# Altium PCB 电子脚铐便携式主控板V3.PcbDoc
Units mm, origin at the board's own origin, x right, y up, seen from the top; angles counter-clockwise.
Board outline 48 x 72 mm, 2 copper layers (Top Layer, Bottom Layer), stack 1.071 mm thick; 65 components, 44 nets, 224 pads, 41 vias.
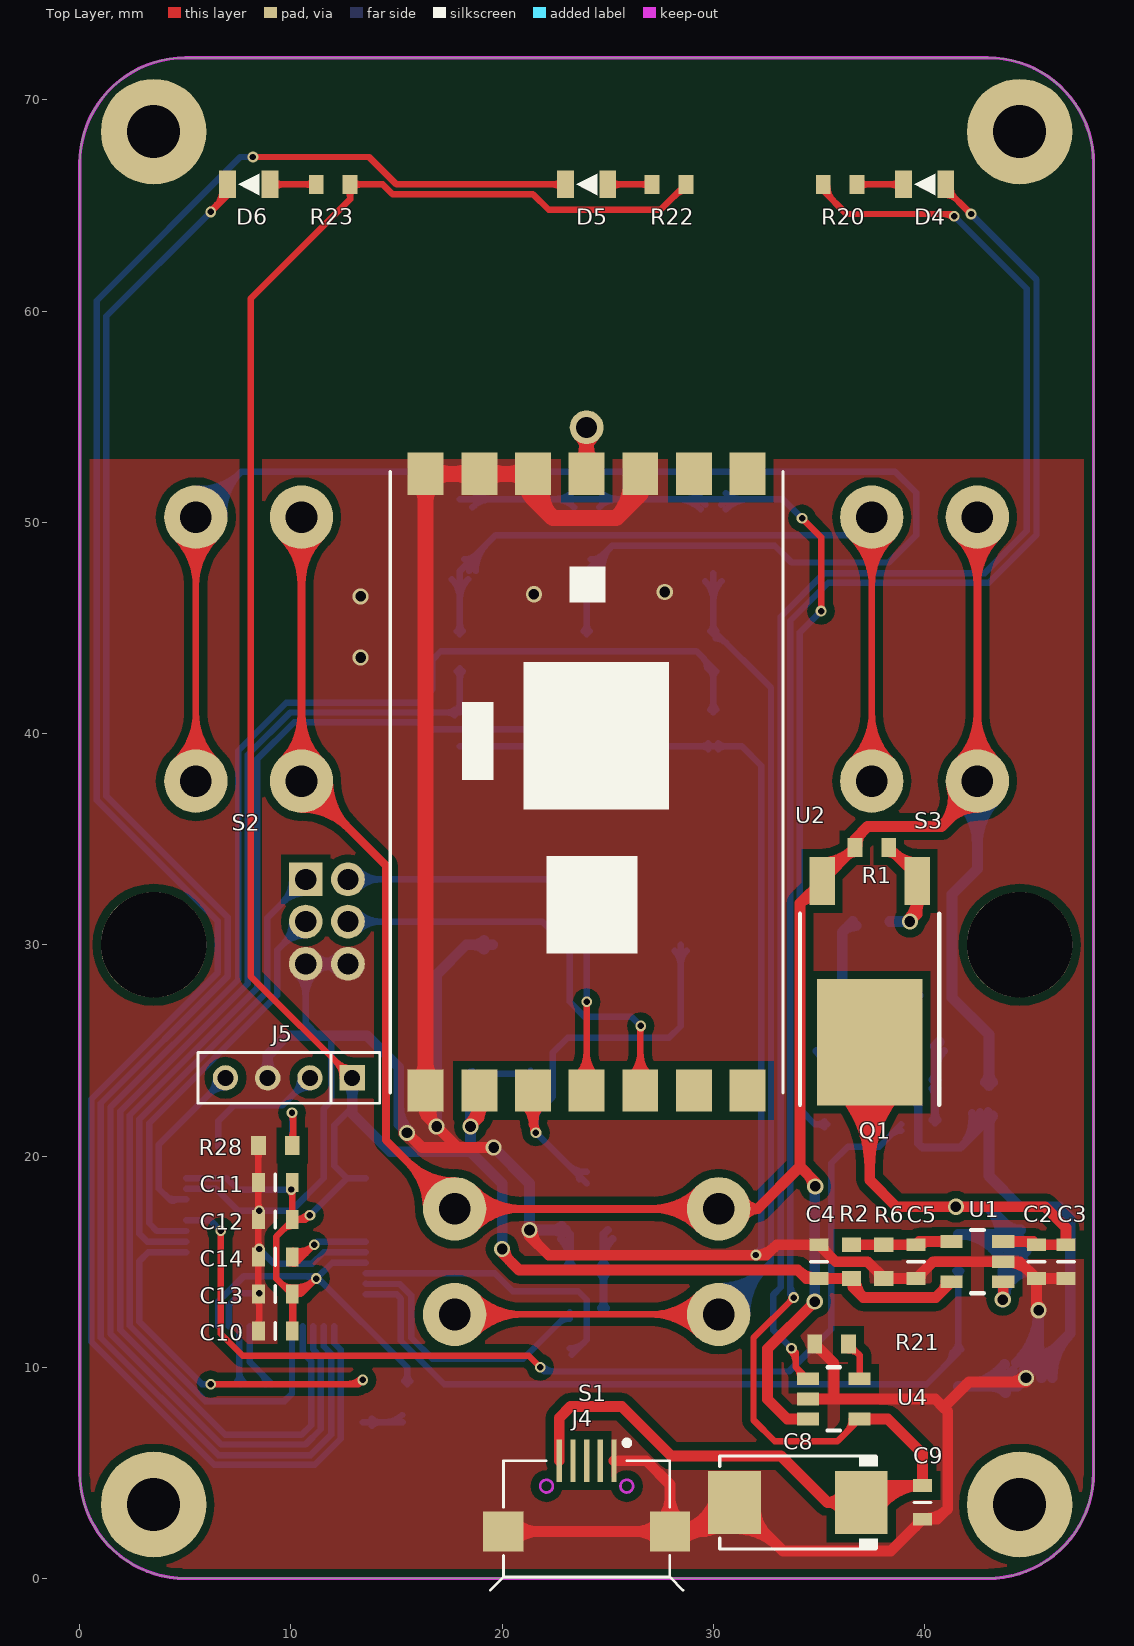
[diagram p0: Top Layer view]
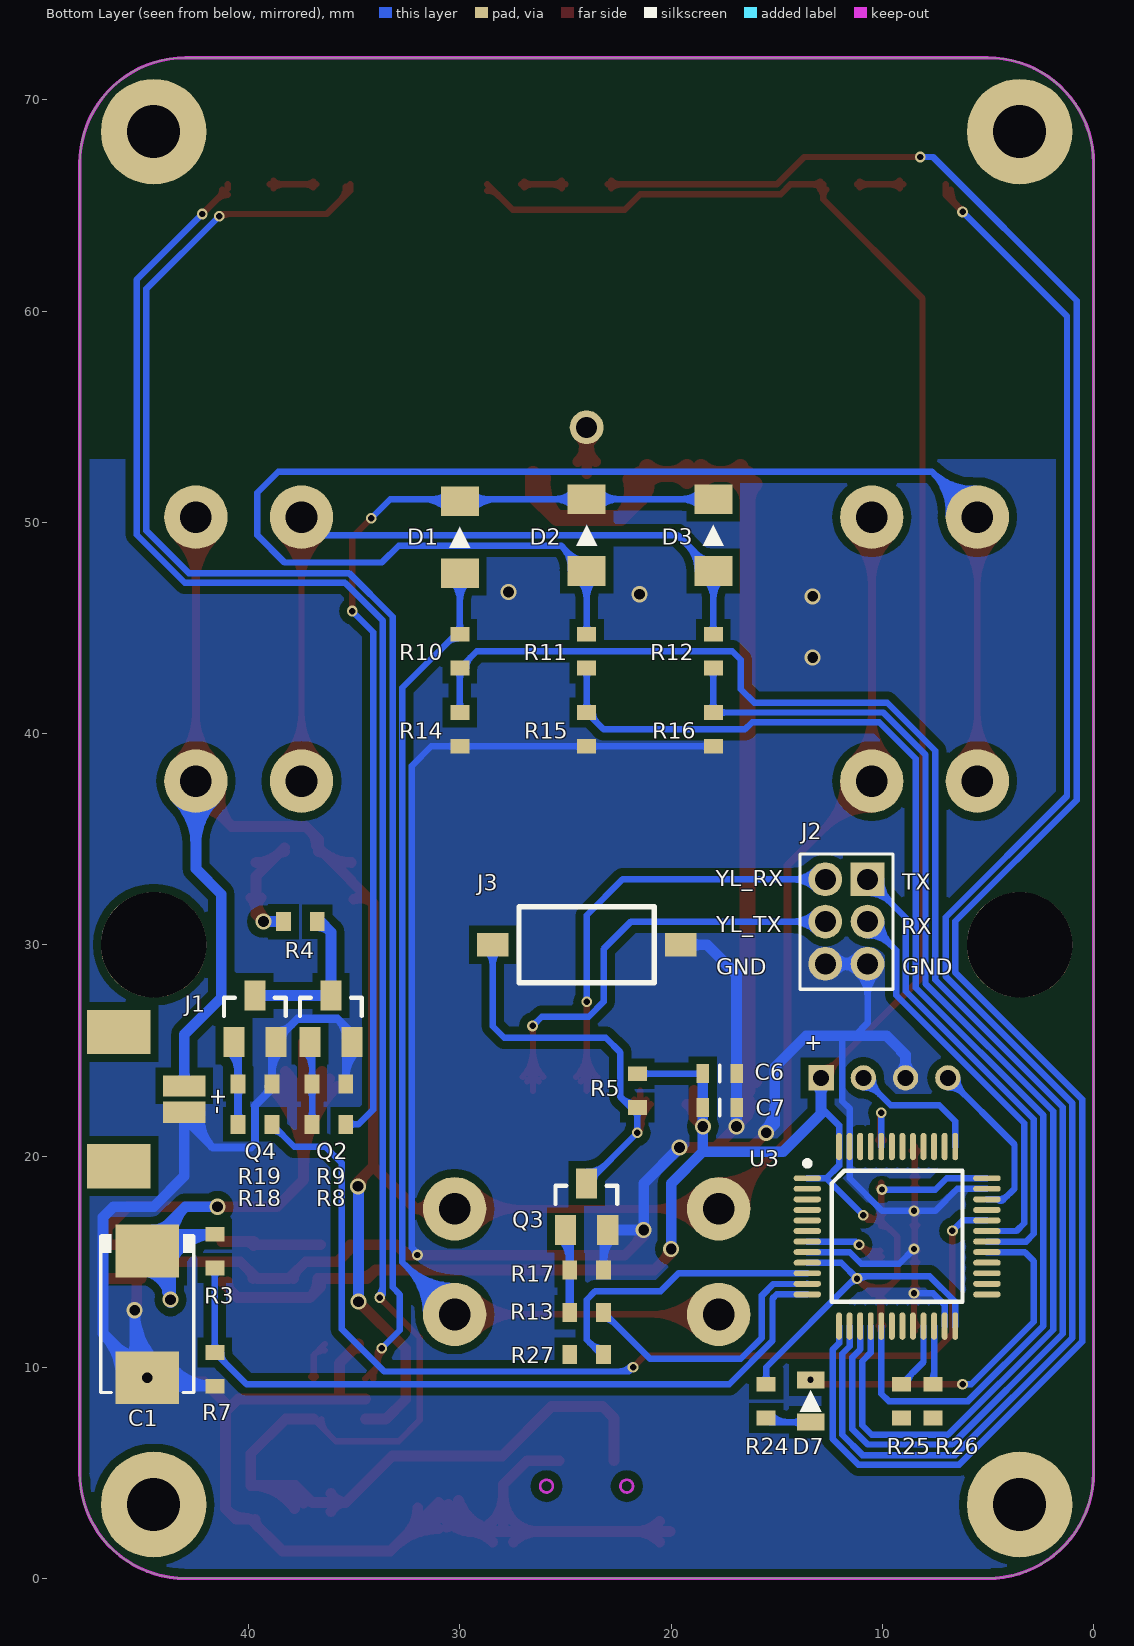
[diagram p1: Bottom Layer view, seen from below]
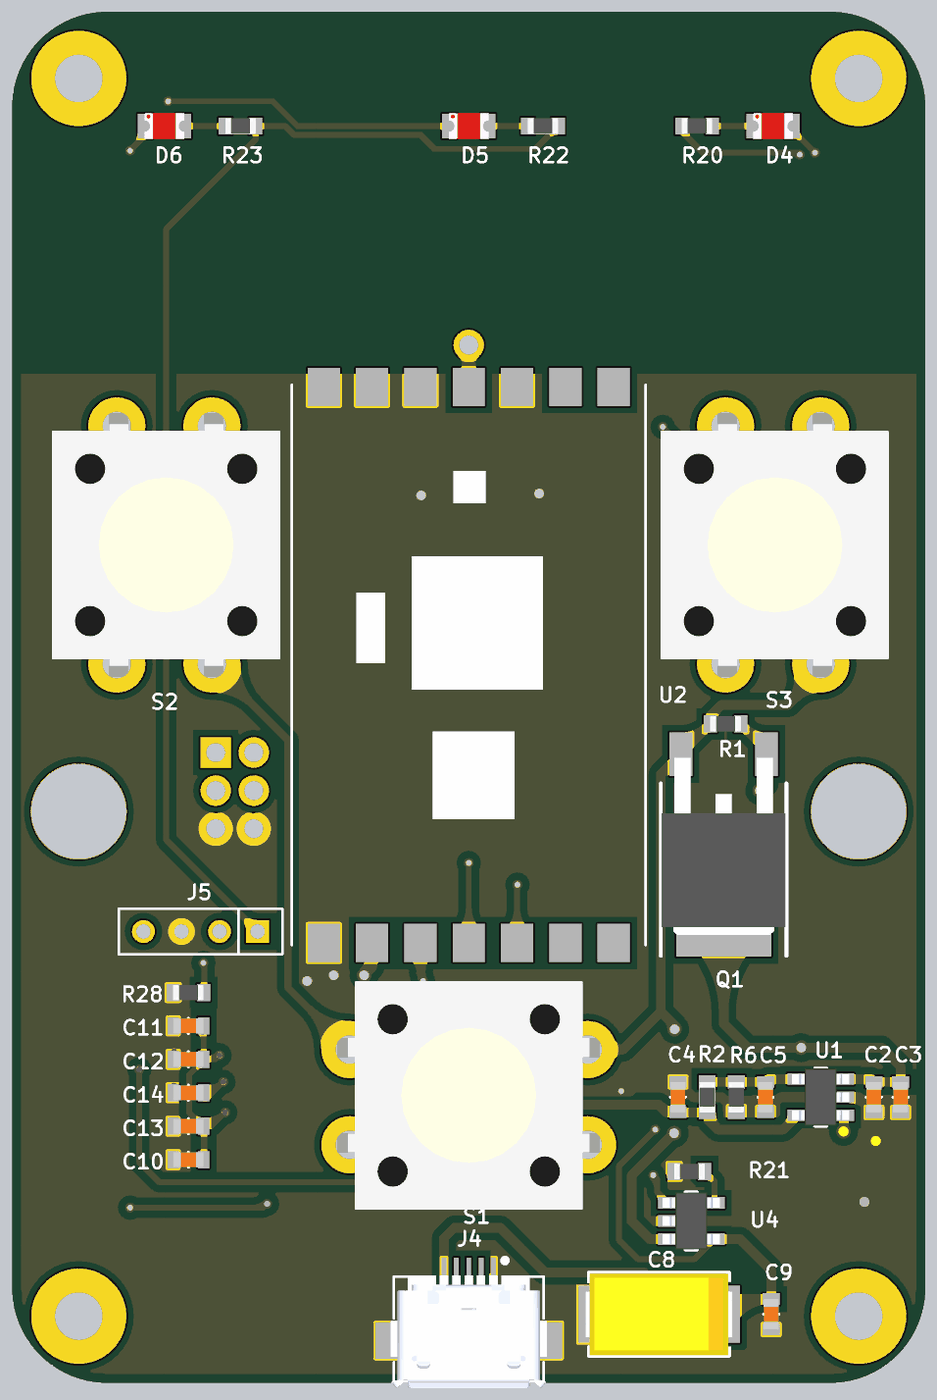
[diagram p2: 3D render of the assembled board from above, using the file's embedded part models]
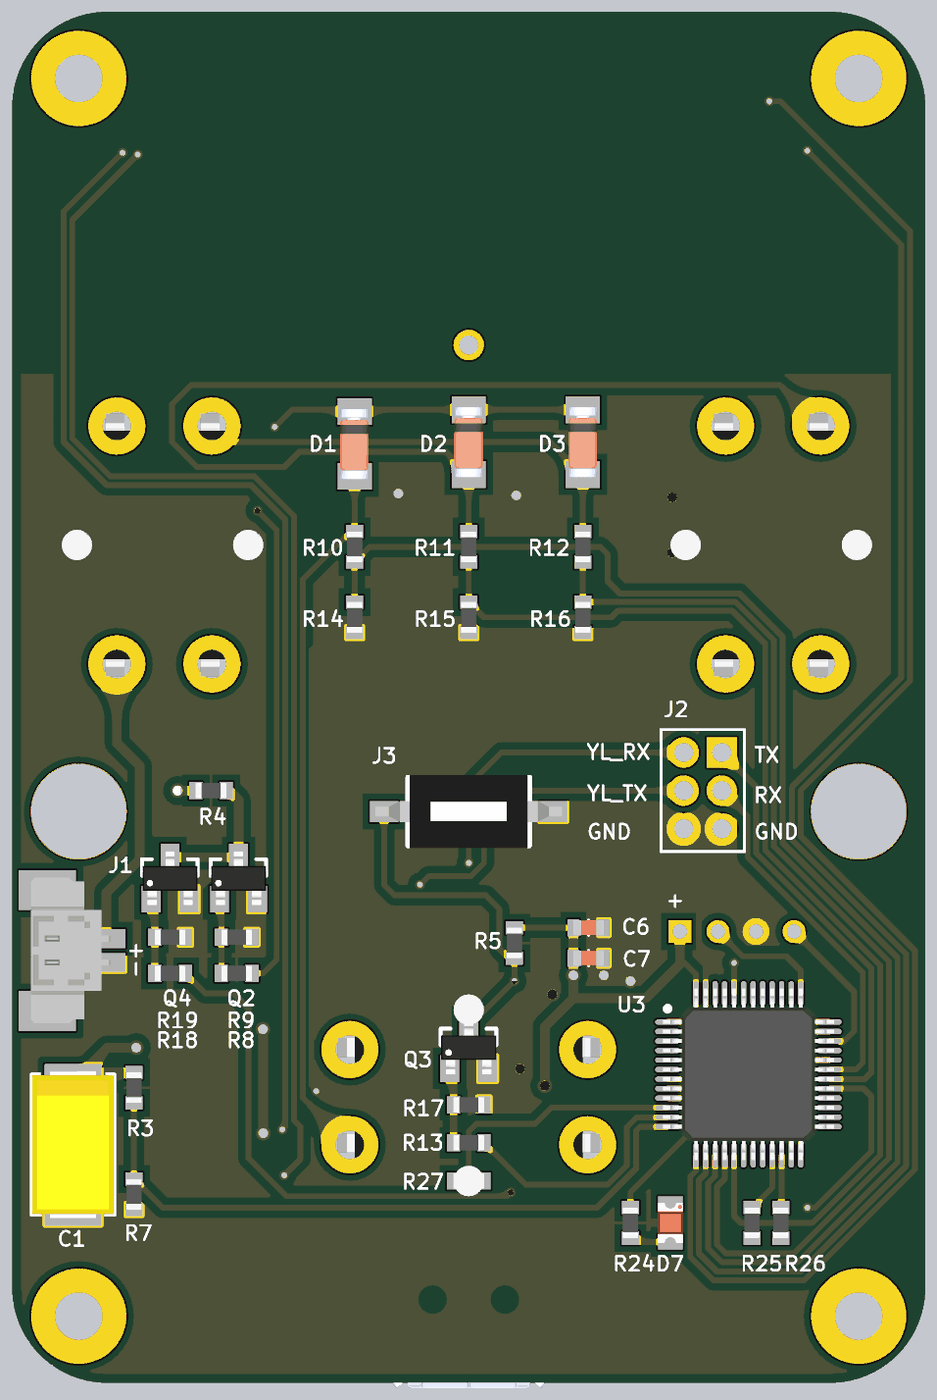
[diagram p3: 3D render of the assembled board from below, using the file's embedded part models]

## Layer stack, top to bottom
Top Solder: solder mask 0.0102, Solder Resist, Dk 3.5
Top Layer: signal copper 0.0356
Dielectric 1: dielectric 1, FR-4, Dk 4.8
Bottom Layer: signal copper 0.0356
Bottom Solder: solder mask 0.0102, Solder Resist, Dk 3.5

## Board outline
0,5 ccw(c5,5) 5,0 43,0 ccw(c43,5) 48,5 48,67 ccw(c43,67) 43,72 5,72 ccw(c5,67) 0,67

## Design rules (kind name [scope] priority, off if disabled: settings)
Clearance [All] p1: gap=0.152
ComponentClearance [All] p1: gap=0 collisioncheckmode=3 verticalgap=0 showdistances=FALSE
Height [All] p1: minheight=0 maxheight=50.8 prefheight=12.7
HoleSize [All] p1: absolutevalues=TRUE maxlimit=5.08 minlimit=0.025 maxpercent=80.000 minpercent=20.000
HoleToHoleClearance [All] p1: gap=0.152 allowstackedmicrovias=TRUE
MinimumSolderMaskSliver [All] p1: minsoldermaskwidth=0
PlaneConnect [All] p1: planeconnectstyle=Direct reliefexpansion=0.508 reliefentries=4 reliefconductorwidth=0.254 reliefairgap=0.254
PolygonConnect [All] p1: connectstyle=Direct reliefconductorwidth=0.254 reliefentries=4 polygonreliefangle="90 Angle" airgapwidth=0.254
RoutingVias [All] p1: holewidth=0.711 width=1.27 viastyle="Through Hole" minholewidth=0.203 minwidth=0.305 maxholewidth=5.08 maxwidth=7.62
SilkToSilkClearance [All] p1: silktosilkclearance=0
SilkToSolderMaskClearance [IsPad] p1: minsilkscreentomaskgap=0 clearancetoexposedcopper=TRUE
SolderMaskExpansion [All] p1: expansion=0.102
Width [All] p1: maxlimit=4 minlimit=0.254 preferedwidth=0.254
21 further rules are at their usual default settings.

## Components (designator, comment, footprint, x,y, rotation, side; value= is the part's Value field where it differs from the comment)
C1 "210uF/16V" C7343 44.8,12.5 r270 bottom
C2 "10uF" C0603 45.3,15 r270 top
C3 "0.1uF" C0603 46.7,15 r90 top
C4 "10uF" C0603 35,15 r90 top
C5 "470pF" C0603 39.6,15 r270 top
C6 "10uF" C0603 17.7,23.9 r180 bottom
C7 "0.1uF" C0603 17.7,22.3 r180 bottom
C8 "210uF/16V" C7343 34,3.6 r180 top
C9 "Cap" C0603 39.9,3.6 r270 top
C10 "0.1uF" C0603 9.261,11.717 r180 top
C11 "0.1uF" C0603 9.261,18.743 r180 top
C12 "0.1uF" C0603 9.261,16.987 r180 top
C13 "0.1uF" C0603 9.261,13.473 r180 top
C14 "0.1uF" C0603 9.261,15.23 r180 top
D1 "1N4148" SOD-80-S 30,49.3 r90 bottom
D2 "1N4148" SOD-80-S 24,49.4 r90 bottom
D3 "1N4148" SOD-80-S 18,49.4 r90 bottom
D4 "LED-G" LED0805 40,66 r180 top locked
D5 "LED" LED0805 24,66 r180 top
D6 "LED" LED0805 8,66 r180 top locked
D7 "LED" LED0805 13.4,8.4 r90 bottom
J1 "Jack 1x2" DF13-2P-1.25V 44.6,22.7 r270 bottom
J2 "Jack 2x3" Jk2*3-2.0 10.7,33.1 r270 bottom
J3 "Jack 1x2" A6S-1101-PH 24,30 r180 bottom
J4 "MicroUSB" MICRO-USB 24,3.9 r180 top locked
J5 "SHD1X4-2.00" Jk1*4-2.0 9.9,23.7 r180 top
Q1 "2SA1615" TO-252 37.4,29.2 r180 top
Q2 "S8050" SOT-23 36.1,26.5 r180 bottom
Q3 "S8050" SOT-23 24,17.6 r180 bottom
Q4 "S8050" SOT-23 39.7,26.5 r180 bottom
R1 "200K" R0603 37.5,34.6 r0 top
R2 "100K" R0603 36.533,15 r90 top
R3 "200K" R0603 41.6,15.5 r270 bottom
R4 "1K" R0603 37.55,31.1 r0 bottom
R5 "200K" R0603 21.6,23.1 r90 bottom
R6 "160K" R0603 38.067,15 r270 top
R7 "100K" R0603 41.6,9.9 r270 bottom
R8 "20K" R0603 36.2,21.5 r0 bottom
R9 "10K" R0603 36.2,23.4 r180 bottom
R10 "200K" R0603 30,43.9 r270 bottom
R11 "200K" R0603 24,43.9 r270 bottom
R12 "200K" R0603 18,43.9 r270 bottom
R13 "200K" R0603 24,12.6 r0 bottom
R14 "100K" R0603 30,40.2 r90 bottom
R15 "100K" R0603 24,40.2 r90 bottom
R16 "100K" R0603 18,40.2 r90 bottom
R17 "100K" R0603 24,14.6 r0 bottom
R18 "20K" R0603 39.7,21.5 r0 bottom
R19 "10K" R0603 39.7,23.4 r180 bottom
R20 "1K" R0603 36,66 r0 top
R21 "1.65K" R0603 35.6,11.1 r0 top
R22 "1K" R0603 27.9,66 r180 top
R23 "1K" R0603 12,66 r180 top
R24 "1K" R0603 15.5,8.4 r270 bottom
R25 "NC" R0603 9.1,8.4 r90 bottom
R26 "NC" R0603 7.6,8.4 r90 bottom
R27 "NC" R0603 24,10.6 r180 bottom
R28 "100K" R0603 9.261,20.5 r180 top
S1 "Switch" B3F-4055 24,15 r180 top locked
S2 "Switch" B3F-4055 8,44 r90 top locked
S3 "Switch" B3F-4055 40,44 r90 top locked
U1 "MIC5219YM5" SOT-23-5 42.5,15 r180 top
U2 "YL-800TS" YL-800TS 24,37.7 r90 top locked
U3 "STM32F103CB" LQFP48 9.3,16.2 r180 bottom locked
U4 "SE9016" SOT-23-5 35.7,8.5 r0 top

## Footprints (in the part's own frame and the unit in brackets; to place one, negate y for a bottom-side part, rotate by r counter-clockwise, add the part's x,y. Pads: shape width x height; smd on the part's side, far side on the other; paste and mask are expansions set on the pad)
A6S-1101-PH [mm] "1位表贴拨码开关2.54mm间距"
  rect 1.5x1.1 smd: 1(-4.45,0) 2(4.45,0)
  silkscreen extent -3.2,-1.8 3.2,1.8, body extent -4.9,-1.92 4.9,1.92, height 3.4
B3F-4055 [mm]
  round 3 hole 1.5: 1(-6.25,-2.5) 1(6.25,-2.5) 2(-6.25,2.5) 2(6.25,2.5)
  body extent -6.9,-6.1 6.9,5.9, height 7.3
C0603 [mm]
  rect 0.6x0.9 smd: 1(-0.8,0) 2(0.8,0)
  silkscreen extent 0,-0.4 0,0.4, body extent -0.8,-0.4 0.8,0.4, height 0.5
C7343 [mm] "100uF/25V"
  rect 2.5x3 smd: 1(-3,0) 2(3,0)
  silkscreen extent -3.8,-2.2 3.7,2.2, body extent -3.87,-2.15 3.87,2.15, height 2.9
DF13-2P-1.25V [mm]
  rect 1x2 smd: 1(-0.625,1.55) 2(0.625,1.55)
  rect 2.1x3 smd: 3(-3.175,-1.55) 4(3.175,-1.55)
  body extent -3.82,-2.41 3.82,1.79, height 4.8
Jk1*4-2.0 [mm] "4P，直插，2.0mm间距，排母"
  rect 1.2x1.2 hole 0.762: 1(-3,0)
  round 1.2 hole 0.762: 2(-1,0) 3(1,0) 4(3,0)
  silkscreen extent -4.3,-1.2 4.3,1.2, body extent -4.25,-1.22 4.25,1.18, height 4.3
Jk2*3-2.0 [mm] "2.0双排座2*3-直"
  rect 1.6x1.6 hole 1: 1(0,0)
  round 1.6 hole 1: 2(0,-2) 3(2,0) 4(2,-2) 5(4,0) 6(4,-2)
  silkscreen extent -1.2,-3.2 5.2,1.2, body extent -1.02,-3.26 4.98,1.25, height 4.4
LED0805 [mm]
  rect 0.8x1.3 smd: 1(-1,0) 2(1,0)
  silkscreen extent -0.5,-0.5 0.5,0.5, body extent -1.05,-0.68 1.05,0.67, height 0.8
LQFP48 [mm]
  oval 1.3x0.28 smd: 1(-4.25,2.75) 2(-4.25,2.25) 3(-4.25,1.75) 4(-4.25,1.25) 5(-4.25,0.75) 6(-4.25,0.25) 7(-4.25,-0.25) 8(-4.25,-0.75) 9(-4.25,-1.25) 10(-4.25,-1.75) 11(-4.25,-2.25) 12(-4.25,-2.75) 25(4.25,-2.75) 26(4.25,-2.25) 27(4.25,-1.75) 28(4.25,-1.25) 29(4.25,-0.75) 30(4.25,-0.25) 31(4.25,0.25) 32(4.25,0.75) 33(4.25,1.25) 34(4.25,1.75) 35(4.25,2.25) 36(4.25,2.75)
  oval 0.28x1.3 smd: 13(-2.75,-4.25) 14(-2.25,-4.25) 15(-1.75,-4.25) 16(-1.25,-4.25) 17(-0.75,-4.25) 18(-0.25,-4.25) 19(0.25,-4.25) 20(0.75,-4.25) 21(1.25,-4.25) 22(1.75,-4.25) 23(2.25,-4.25) 24(2.75,-4.25) 37(2.75,4.25) 38(2.25,4.25) 39(1.75,4.25) 40(1.25,4.25) 41(0.75,4.25) 42(0.25,4.25) 43(-0.25,4.25) 44(-0.75,4.25) 45(-1.25,4.25) 46(-1.75,4.25) 47(-2.25,4.25) 48(-2.75,4.25)
  silkscreen extent -4.38,-3.1 3.1,3.57, body extent -4.49,-4.5 4.51,4.5, height 1.8
MICRO-USB [mm]
  rect 0.25x2 smd: 1(1.3,-1.679) 2(0.65,-1.679) 3(0,-1.679) 4(-0.65,-1.679) 5(-1.3,-1.679)
  rect 1.9x1.9 smd: 5(-3.95,1.679) 5(3.95,1.679)
  Keep-Out Layer circle w0.127: c1.9,-0.471 r0.3
  Keep-Out Layer circle w0.127: c-1.9,-0.471 r0.3
  silkscreen extent -4.57,-2.64 4.57,4.46, body extent -4.1,-1.75 4.1,4.18, height 2.77
R0603 [mm]
  rect 0.7x0.9 smd: 1(-0.8,0) 2(0.8,0)
  body extent -0.8,-0.4 0.8,0.4, height 0.37
SOD-80-S [mm]
  rect 1.4x1.8 smd: 1(-1.7,0) 2(1.7,0)
  silkscreen extent -0.5,-0.5 0.5,0.5, body extent -1.85,-0.79 1.85,0.81, height 1.6
SOT-23 [mm]
  rect 1x1.4 smd: 1(-1,-1.1) 2(1,-1.1) 3(0,1.1)
  silkscreen extent -1.47,0.13 1.45,1, body extent -1.45,-1.4 1.45,1.4, height 1.3
SOT-23-5 [mm]
  rect 1.05x0.6 smd: 1(-1.225,0.95) 2(-1.225,0) 3(-1.225,-0.95) 4(1.225,-0.95) 5(1.225,0.95)
  silkscreen extent -0.3,-1.5 0.3,1.5, body extent -1.5,-1.5 1.5,1.5, height 1.2
TO-252 [mm]
  rect 1.2x2.28 smd: 1(-2.25,-3.816) 3(2.25,-3.816)
  rect 5x6 smd: 2(0,3.816)
  silkscreen extent -3.3,-2.27 3.3,6.78, body extent -3.25,-3.62 3.25,5.68, height 2.3
YL-800TS [mm]
  rect 2x1.7 smd: 1(-14.6,7.62) 2(-14.6,5.08) 3(-14.6,2.54) 4(-14.6,0) 5(-14.6,-2.54) 6(-14.6,-5.08) 7(-14.6,-7.62) 8(14.6,-7.62) 9(14.6,-5.08) 10(14.6,-2.54) 11(14.6,0) 12(14.6,2.54) 13(14.6,5.08) 14(14.6,7.62)
  silkscreen extent -14.7,-9.3 14.7,9.3, body extent -14.7,-9.3 14.7,9.3, height 2.3

## Part data
C1 C8: library part "Cap Poll"
C2 C4 C5 C6 C7: library part CAP, "CAP"
C3 C10 C11 C12 C13 C14: library part "Cap Semi"
C9: "Capacitor"
D1 D2 D3: library part DIODE-SWITCHING, "Silicon Epitaxial Planar Diodes"
D4: library part LED
J1 J3: "插座"
J2: "双排座"
J5: library part HEADER1X4
Q1: library part MJD122
Q2 Q3 Q4: "NPN triode, 0.5A Max"
R1 R2 R3 R6 R7 R8 R9 R10 R11 R12 R18 R19 R25 R26 R27 R28: library part Res
R4 R5 R13 R14 R15 R16 R17: library part RES, "Resistor"
R20 R21 R22 R23 R24: library part Res, "Resistor"
S1 S2 S3: library part Sw
U1: library part MIC5205
U3: library part STM32F103Cx

## Free pads (board coordinates)
  round 5 hole 2.5: ""(3.5,3.5) ""(3.5,68.5) ""(44.5,3.5) ""(44.5,68.5)
  round 5 hole 5: ""(3.5,30) ""(44.5,30)
  round 1.6 hole 1: ""(24,54.5)

## Via types
v1: diameter 0.508, hole 0.305, Top Layer to Bottom Layer, tented both sides, 24 vias
v2: diameter 0.762, hole 0.508, Top Layer to Bottom Layer, tented both sides, 17 vias

## Nets (pads, with @x,y where several pads share a name; then routed paths per layer and width w, separated by ;. In a path a pad name is that pad's centre, name@x,y a point inside that pad or via, vN(x,y) a via of type N, cw(c..) or ccw(c..) an arc to the next point about the centre after c; other vN are vias at no path point)
+3.3V: C4.1 C6.1 C7.1 C10.1 C11.1 C12.1 C13.1 J5.1 R2.1 R5.2 R22.1 R23.1 R24.1 U1.5 U2.2 U3.1 U3.9 U3.24 U3.36 U3.48 | length 170.8
  Top Layer w0.305: 9.494,14.006 ccw(c10.061,14.573) C13.1@10.061,13.771 ; 9.619,16.506 cw(c10.061,16.064) C12.1@10.061,16.689 ; C11.1@9.945,18.345 cw(c9.663,18.063) 10.061,18.063 ; C11.1@9.949,18.492 ccw(c9.725,18.743) C11.1 ; C12.1@9.957,17.241 ccw(c9.705,17.493) 10.061,17.493 ccw(c10.418,17.493) C12.1@10.166,17.241 ; C11.1@9.957,18.489 cw(c9.705,18.237) 10.061,18.237 cw(c10.418,18.237) C11.1@10.166,18.489 ; C13.1@10.052,13.466 ccw(c10.103,14.337) 10.72,13.72 ; C12.1 C11.1 ; C13.1@10.07,13.771 ccw(c10.157,15.243) v1(11.2,14.2) 10.473,13.473 10.1,13.473 C13.1@10.063,13.437 ; 10.1,12.316 cw(c9.611,12.316) 9.957,11.971 ccw(c9.705,12.223) 10.061,12.223 ccw(c10.418,12.223) C10.1@10.166,11.971 ; 10.1,12.873 ccw(c9.611,12.873) 9.957,13.219 cw(c9.705,12.967) 10.061,12.967 cw(c10.418,12.967) C13.1@10.166,13.219 ; C13.1@10.1,13.4 10.1,11.755 C10.1 10.061,13.434 C13.1@10.063,13.437 ; C12.1@10.14,16.987 ccw(c10.14,17.96) v1@10.828,17.272 ; C13.1@10.166,13.369 cw(c10.418,13.117) 10.418,13.473 cw(c10.418,13.83) C13.1@10.166,13.578 ; C12.1@10.166,16.882 cw(c10.418,16.63) 10.418,16.987 cw(c10.418,17.343) C12.1@10.166,17.091 ; v1(10.9,17.2) 10.687,16.987 10.1,16.987 9.3,16.187 9.3,14.2 C13.1@10.063,13.437 ; J5.1@12.452,23.7 ccw(c11.372,23.7) 12.136,24.464 ccw(c12.9,25.228) J5.1@12.9,24.148 ; R23.1@12.66,65.76 cw(c12.323,65.423) 12.8,65.423 cw(c13.277,65.423) R23.1@12.94,65.76 ; J5.1 8.1,28.5 8.1,60.6 12.8,65.3 R23.1 14.353,66 14.811,65.543 21.457,65.543 22.2,64.8 27.5,64.8 R22.1 ; R23.1@12.94,65.86 cw(c13.277,65.523) 13.277,66 cw(c13.277,66.477) R23.1@12.94,66.14 ; 28.192,65.492 cw(c28.7,64.984) R22.1@28.7,65.702
  Top Layer w0.508: v2@18.41,21.49 ccw(c17.179,22.721) U2.2@18.92,22.721 ; v2(18.5,21.4) 18.92,21.82 ; U2.2@18.583,22.458 cw(c18.147,21.82) 18.92,21.82 ; U2.2 18.92,21.82 ; U2.2@19.257,22.458 ccw(c19.693,21.82) 18.92,21.82 ; v2(20,15.6) 20,15.4 20.8,14.6 34,14.6 34.4,14.2 C4.1 36.6,14.2 36.6,13.8 37.1,13.3 ; v2@20.127,15.6 ccw(c20.916,15.6) 20.358,15.042 ; 34.003,14.597 ccw(c34.85,15.443) C4.1@34.85,14.246 ; R2.1@36.729,14.2 ccw(c37.995,14.195) 37.1,13.3 ; 40.812,13.587 ccw(c40.35,14.05) U1.5@41.004,14.05 ; U1.5 40.525,13.3 37.1,13.3
  Bottom Layer w0.305: U3.36 6.95,18.95 7.5,18.4 10,18.4 v1(10.017,18.417) ; U3.24 6.55,13.097 7.753,14.3 11.1,14.3 v1(11.2,14.2) ; 9.731,18.4 ccw(c9.731,18.702) v1@9.945,18.488 ; 10.713,14.3 cw(c10.713,13.713) v1@11.128,14.128 ; v1(10.9,17.2) 12.65,18.95 ; v1@11.2,14.098 cw(c11.2,13.612) 11.544,13.956 ; 12.9,22.3 12.05,21.45 U3.48 12.05,19.55 12.65,18.95 ; U3.9 11.95,14.95 v1(11.2,14.2) ; U3.1 12.65,18.95 ; R24.1@15.36,9.34 ccw(c15.023,9.677) 15.5,9.677 ccw(c15.977,9.677) R24.1@15.64,9.34 ; R24.1 15.5,10 11.3,14.2 v1(11.2,14.2) ; C6.1 R5.2 ; C6.1@18.604,23.796 cw(c18.856,23.544) 18.856,23.9 cw(c18.856,24.256) C6.1@18.604,24.004 ; R5.2@21.36,23.76 ccw(c21.023,23.423) 21.023,23.9 ccw(c21.023,24.377) R5.2@21.36,24.04
  Bottom Layer w0.508: J5.1@12.655,23.455 cw(c12.065,22.865) 12.9,22.865 cw(c13.735,22.865) J5.1@13.145,23.455 ; J5.1 12.9,22.3 12.9,22 14.7,20.2 18.5,20.2 ; C6.1 C7.1 v2(18.5,21.4) 18.5,20.2 ; v2(20,15.6) 20,18.7 18.5,20.2
AD_KEY1: R10.2 R14.2 U3.15 | length 77.3
  Bottom Layer w0.305: U3.15 11.05,10.843 11.414,10.479 11.414,7.068 10.689,6.343 6.704,6.343 1.457,11.589 1.457,22.311 7.5,28.353 7.5,39.185 9.773,41.457 16.057,41.457 16.7,42.1 16.7,43.5 17.1,43.9 29.2,43.9 R10.2 R14.2 ; 29.492,43.608 cw(c28.984,43.1) R10.2@29.702,43.1 ; R14.2@29.86,41.14 ccw(c29.523,41.477) 30,41.477 ccw(c30.477,41.477) R14.2@30.14,41.14 ; R10.2@29.86,42.96 cw(c29.523,42.623) 30,42.623 cw(c30.477,42.623) R10.2@30.14,42.96
AD_KEY2: R11.2 R15.2 U3.17 | length 62.8
  Bottom Layer w0.305: U3.17 10.05,8.75 9.7,8.4 5.94,8.4 2.372,11.968 2.372,21.932 8.414,27.975 8.414,38.806 10.151,40.543 16.161,40.543 16.504,40.2 23.2,40.2 R15.2 R11.2 ; 23.492,40.492 ccw(c22.984,41) R15.2@23.702,41 ; R15.2@23.86,41.14 ccw(c23.523,41.477) 24,41.477 ccw(c24.477,41.477) R15.2@24.14,41.14 ; R11.2@23.86,42.96 cw(c23.523,42.623) 24,42.623 cw(c24.477,42.623) R11.2@24.14,42.96
AD_KEY3: R12.2 R16.2 U3.16 | length 61.1
  Bottom Layer w0.305: U3.16 10.55,10.697 10.957,10.289 10.957,7.257 10.5,6.8 6.893,6.8 1.914,11.779 1.914,22.121 7.957,28.164 7.957,38.995 9.962,41 R16.2 R12.2 ; R16.2@17.76,40.86 ccw(c17.423,40.523) 17.423,41 ccw(c17.423,41.477) R16.2@17.76,41.14 ; R16.2@17.86,41.14 ccw(c17.523,41.477) 18,41.477 ccw(c18.477,41.477) R16.2@18.14,41.14 ; R12.2@17.86,42.96 cw(c17.523,42.623) 18,42.623 cw(c18.477,42.623) R12.2@18.14,42.96
ADPOW: R3.2 R7.1 U3.12 | length 37.7
  Bottom Layer w0.305: U3.12 15.003,13.45 15.2,13.253 15.2,11.253 17.253,9.2 40.1,9.2 R7.1 R3.2 ; 41.092,10.192 ccw(c40.584,10.7) R7.1@41.302,10.7 ; R7.1@41.46,10.84 ccw(c41.123,11.177) 41.6,11.177 ccw(c42.077,11.177) R7.1@41.74,10.84 ; R3.2@41.46,14.56 cw(c41.123,14.223) 41.6,14.223 cw(c42.077,14.223) R3.2@41.74,14.56
ANT: pad.@24,54.5 U2.11 | length 9.2
  Top Layer w0.508: U2.11@23.579,52.871 ccw(c22.561,53.889) 24,53.889 ccw(c25.439,53.889) U2.11@24.421,52.871 ; pad.@23.614,54.114 cw(c22.682,53.182) 24,53.182 cw(c25.318,53.182) pad.@24.386,54.114 ; pad.@23.665,54.069 cw(c23.293,53.591) 23.878,53.434 ; pad.@23.727,54.027 cw(c23.338,53.353) 24.09,53.555 ; 23.91,53.555 cw(c24.662,53.353) pad.@24.273,54.027 ; U2.11 pad.@24,54.5 ; 24.122,53.434 cw(c24.707,53.591) pad.@24.335,54.069
BAT: J1.1 Q1.3 R1.1 S1.1 S2.1 S3.1 U4.3 | length 206.9
  Top Layer w0.381: S2.1@9.574,38.676 ccw(c7.339,40.911) 10.5,40.911 ccw(c13.661,40.911) S2.1@11.426,38.676 ; S2.1@9.574,49.324 cw(c7.339,47.089) 10.5,47.089 cw(c13.661,47.089) S2.1@11.426,49.324 ; S2.1@9.843,38.407 ccw(c8.258,39.992) 10.5,39.992 ccw(c12.742,39.992) S2.1@11.157,38.407 ; S2.1@9.843,49.593 cw(c8.258,48.008) 10.5,48.008 cw(c12.742,48.008) S2.1@11.157,49.593 ; S2.1@10.5,36.441 cw(c10.5,33.279) 12.735,35.515 cw(c14.971,37.75) S2.1@11.81,37.75 ; S2.1@10.5,36.822 cw(c10.5,34.58) 12.085,36.165 cw(c13.67,37.75) S2.1@11.429,37.75 ; S2.1@10.5,50.25 10.5,37.75 14.5,33.75 14.5,20.75 17.75,17.5 S1.1@30.25,17.5 ; S1.1@16.44,17.5 ccw(c13.279,17.5) 15.515,19.735 ccw(c17.75,21.971) S1.1@17.75,18.81 ; S1.1@16.821,17.5 ccw(c14.58,17.5) 16.165,19.085 ccw(c17.75,20.67) S1.1@17.75,18.429 ; S1.1@18.407,16.843 cw(c19.992,15.258) 19.992,17.5 cw(c19.992,19.742) S1.1@18.407,18.157 ; S1.1@18.676,16.574 cw(c20.911,14.339) 20.911,17.5 cw(c20.911,20.661) S1.1@18.676,18.426 ; S1.1@29.324,16.574 ccw(c27.089,14.339) 27.089,17.5 ccw(c27.089,20.661) S1.1@29.324,18.426 ; S1.1@29.593,16.843 ccw(c28.008,15.258) 28.008,17.5 ccw(c28.008,19.742) S1.1@29.593,18.157 ; S3.1@41.574,38.676 ccw(c39.339,40.911) 42.5,40.911 ccw(c45.661,40.911) S3.1@43.426,38.676 ; S3.1@41.574,49.324 cw(c39.339,47.089) 42.5,47.089 cw(c45.661,47.089) S3.1@43.426,49.324 ; S3.1@41.843,38.407 ccw(c40.258,39.992) 42.5,39.992 ccw(c44.742,39.992) S3.1@43.157,38.407 ; S3.1@41.843,49.593 cw(c40.258,48.008) 42.5,48.008 cw(c44.742,48.008) S3.1@43.157,49.593 ; S3.1@42.2,37 42.5,37.3 42.5,37.75 S3.1@42.5,50.25
  Top Layer w0.508: S1.1@30.25,17.5 32.1,17.5 ; S1.1@31.405,17.032 cw(c32.1,16.75) 32.1,17.5 ; S1.1@31.405,17.968 ccw(c32.1,18.25) 32.1,17.5 ; 34.459,19.141 cw(c33.885,18.567) v2@34.696,18.567 ; U4.3 33.496,7.55 32.563,8.484 32.563,10.871 v2(34.798,13.106) ; v2(34.823,18.567) 34.823,18.777 34.1,19.5 ; Q1.3@35.021,32.155 ccw(c34.704,31.362) 34.1,31.966 ; Q1.3@35.15,33.902 ccw(c35.15,35.959) R1.1@36.604,34.504 ; R1.1@36.365,34.265 cw(c36.7,33.931) R1.1@36.7,34.404 ; R1.1@36.796,34.7 cw(c37.752,34.7) 37.076,35.376 ; 40.8,35.6 ccw(c39.453,36.947) S3.1@41.295,37.433 ; 41.141,35.941 cw(c42.5,34.582) S3.1@42.5,36.504 ; 41.425,36.225 ccw(c40.443,37.208) S3.1@41.786,37.562 ; S3.1@42.2,37 40.8,35.6 37.3,35.6 36.7,35 R1.1 35.15,33.05 Q1.3 34.1,31.966 ; 32.1,17.5 34.1,19.5 ; 34.1,19.5 34.1,31.966
  Bottom Layer w0.508: v2(34.798,13.106) 34.798,18.542 v2(34.823,18.567) ; S3.1@41.619,36.869 cw(c39.492,34.742) 42.5,34.742 cw(c45.508,34.742) S3.1@43.381,36.869 ; S3.1@41.978,37.228 cw(c40.718,35.968) 42.5,35.968 cw(c44.282,35.968) S3.1@43.022,37.228 ; S3.1@42.5,37.75 42.5,33.6 41.3,32.4 41.3,27.5 43.05,25.75 J1.1 ; J1.1@42.876,23.499 ccw(c42.456,23.919) 43.05,23.919 ccw(c43.644,23.919) J1.1@43.224,23.499
BATOUT: C1.1 C2.1 C3.2 Q1.2 R3.1 U1.1 U1.3 | length 67.4
  Top Layer w0.508: Q1.2@35.812,23.296 cw(c31.978,19.462) 37.4,19.462 cw(c42.822,19.462) Q1.2@38.988,23.296 ; Q1.2@36.171,23.655 cw(c33.204,20.688) 37.4,20.688 cw(c41.596,20.688) Q1.2@38.629,23.655 ; Q1.2@36.53,24.014 cw(c34.431,21.915) 37.4,21.915 cw(c40.369,21.915) Q1.2@38.27,24.014 ; Q1.2 37.4,18.861 38.661,17.6 v2(41.478,17.6) 45.7,17.6 46.7,16.6 C3.2 C2.1 45.15,15.95 U1.3 ; v2(43.7,13.2) 43.725,13.225 U1.1 ; 44.677,15.95 cw(c44.677,15.327) C2.1@45.117,15.767
  Bottom Layer w0.508: v2(41.478,17.6) 43,17.6 ; 42.434,16.3 cw(c42.434,14.407) C1.1@44.116,15.276 ; 43.269,16.3 cw(c43.269,14.838) C1.1@44.568,15.509 ; C1.1@43.574,15.697 ccw(c41.514,16.114) 43,17.6 ; v2@43.636,13.31 ccw(c43.416,13.692) 43.842,13.578 ; C1.1@43.665,15.043 ccw(c41.6,13.975) R3.1 C1.1@44,16.3 ; 43.669,16.931 cw(c42.628,15.889) C1.1@44.072,15.597 ; v2@43.7,13.048 cw(c45.255,13.048) C1.1@44.825,14.543 ; v2(43.7,13.2) 43.7,14.4 C1.1 44.8,15.8 43,17.6 ; 43.7,13.723 cw(c45.061,13.723) C1.1@44.685,15.031 ; C1.1@43.7,14.398 cw(c44.867,14.398) C1.1@44.544,15.519 ; 43.789,16.811 ccw(c44.55,17.573) C1.1@44.55,16.496
BOOT0: R28.1 U3.44 | length 4.2
  Top Layer w0.305: R28.1@9.922,20.74 ccw(c9.491,21.171) 10.1,21.171 ; v1@9.978,21.978 cw(c9.684,21.684) 10.1,21.684 ; R28.1@10.1,20.5 v1@10.1,22 ; 10.1,20.984 ccw(c10.445,20.984) R28.1@10.201,20.74
  Bottom Layer w0.305: U3.44 v1(10.05,22.05)
GND: C1.2 C2.2 C3.1 C4.2 C5.2 C6.2 C7.2 C8.2 C9.2 C10.2 C11.2 C12.2 C13.2 C14.2 J1.2 J2.5 J2.6 J3.2 J4.5 J5.3 Q2.2 Q3.2 Q4.2 R6.2 R7.2 R9.2 R14.1 R15.1 R16.1 R17.1 R19.2 R21.1 R28.2 U1.2 U2.1 U2.10 U2.12 U2.13 U2.14 U3.8 U3.23 U3.35 U3.47 U4.2 | length 386.2
  Top Layer w0.305: R28.2@8.322,20.26 cw(c7.984,19.923) 8.461,19.923 cw(c8.938,19.923) R28.2@8.601,20.26 ; C10.2@8.357,11.971 ccw(c8.011,12.316) 8.5,12.316 ; C13.2@8.357,13.219 cw(c8.011,12.873) 8.5,12.873 ; C13.2@8.357,13.728 ccw(c8.105,13.98) 8.461,13.98 ccw(c8.818,13.98) C13.2@8.566,13.728 ; C14.2@8.357,14.976 cw(c8.105,14.724) 8.461,14.724 cw(c8.818,14.724) C14.2@8.566,14.976 ; C14.2@8.357,15.484 ccw(c8.105,15.736) 8.461,15.736 ccw(c8.818,15.736) C14.2@8.566,15.484 ; C12.2@8.357,16.732 cw(c8.105,16.48) 8.461,16.48 cw(c8.818,16.48) C12.2@8.566,16.732 ; C12.2@8.357,17.241 ccw(c8.105,17.493) 8.461,17.493 ccw(c8.818,17.493) C12.2@8.566,17.241 ; C11.2@8.357,18.489 cw(c8.105,18.237) 8.461,18.237 cw(c8.818,18.237) C11.2@8.566,18.489 ; C11.2@8.357,18.998 ccw(c8.105,19.25) 8.461,19.25 ccw(c8.818,19.25) C11.2@8.566,18.998 ; C10.2 8.5,11.755 C13.2@8.5,13.4 ; C13.2 C14.2 C12.2 C11.2 R28.2@8.461,20.461 ; C13.2@8.461,13.839 ccw(c8.839,13.839) C13.2@8.572,13.572 ; 8.461,15.939 ccw(c8.839,15.939) C14.2@8.572,15.672 ; C12.2@8.461,17.061 cw(c8.839,17.061) C12.2@8.572,17.328 ; 8.461,17.739 ccw(c8.839,17.739) v1@8.572,17.472 ; C14.2@8.461,15.261 cw(c8.839,15.261) C14.2@8.572,15.528 ; C14.2@8.461,15.261 cw(c8.839,15.261) C14.2@8.572,15.528 ; C14.2@8.461,15.261 cw(c8.839,15.261) C14.2@8.572,15.528
  Top Layer w0.508: v2(15.5,21.1) 16.2,20.4 17.9,20.4 ; U2.1@16.083,22.433 cw(c15.788,21.92) 16.38,21.92 ; U2.1 16.38,21.92 ; U2.1@16.448,22.894 ccw(c17.082,22.376) 16.503,21.797 ; U2.1@16.677,22.433 ccw(c16.972,21.92) 16.38,21.92 ; U2.1@16.841,22.573 ccw(c17.519,22.019) v2(16.9,21.4) ; v2(19.6,20.4) 17.9,20.4 ; J4.5@20.05,2.221 J4.5@27.95,2.221 ; J4.5@20.542,1.729 cw(c21.73,0.541) 21.73,2.221 cw(c21.73,3.901) J4.5@20.542,2.713 ; v2(21.3,16.5) 21.3,16.2 22.2,15.3 32.5,15.3 33,15.8 C4.2 35.8,15 37.3,15 38.1,14.2 C5.2 40.4,15 U1.2 44.5,15 C2.2 ; v2@21.427,16.5 ccw(c22.458,16.5) 21.729,15.771 ; J4.5@25.3,5.579 26.821,5.579 27.95,4.45 J4.5@27.95,2.221 ; J4.5@27.458,1.729 ccw(c26.27,0.541) 26.27,2.221 ccw(c26.27,3.901) 27.458,2.713 ccw(c26.27,3.901) 27.95,3.901 ccw(c29.63,3.901) J4.5@28.442,2.713 ; J4.5@28.444,1.731 cw(c29.621,0.563) 29.621,2.221 ; J4.5@28.444,2.711 ccw(c29.621,3.879) 29.621,2.221 ; J4.5@28.679,2.221 ccw(c28.679,4.207) C8.2@30.542,3.519 ; 29.408,2.221 ccw(c29.408,3.938) C8.2@31.019,3.343 ; C8.2@30.007,3.27 cw(c28.679,3.164) 29.621,2.221 ; C8.2@30.066,3.695 cw(c27.95,4.476) J4.5@27.95,2.221 ; C8.2@30.628,2.426 ccw(c30.279,1.563) 29.621,2.221 ; C8.2@31,2.354 cw(c31,-0.654) 33.127,1.473 ; C8.2@31,2.862 cw(c31,1.08) 32.26,2.34 ; C8.2@31.996,3.35 ccw(c33.797,3.35) 32.524,2.076 ; v1(32.013,15.316) ccw(c32.013,16.531) 32.872,15.672 ; U4.2 35.7,8.5 ; R21.1@34.8,10.904 cw(c34.8,10.431) R21.1@35.135,10.765 ; R21.1 35.7,10.2 35.7,8.5 ; C4.2@35.196,15.8 ccw(c35.669,15.8) 35.335,15.465 ; 37.709,14.591 cw(c37.317,14.2) R6.2@37.871,14.2 ; 39.565,2.465 ccw(c39.231,2.8) C9.2@39.704,2.8 ; C5.2@39.796,14.2 cw(c40.269,14.2) 39.935,14.535 ; C9.2@40.05,2.846 ccw(c40.05,4.285) 41.067,3.267 ; U1.2@43.95,14.954 cw(c43.95,13.515) 44.967,14.533 ; 44.011,9.3 ccw(c44.011,10.289) v2@44.71,9.59 ; v2(44.8,9.5) 44.8,9.3 42.1,9.3 40.9,8.1 ; 44.965,14.535 cw(c44.631,14.2) C2.2@45.104,14.2 ; 45.3,13.248 ccw(c45.948,13.248) v2@45.49,12.79 ; v2(45.4,12.7) 45.3,12.6 C2.2 ; C3.1 C2.2 ; 16.38,21.92 v2(16.9,21.4) ; v2(16.9,21.4) 17.9,20.4 ; J4.5@27.95,2.221 29.621,2.221 ; 29.621,2.221 C8.2 33.3,1.3 38.4,1.3 C9.2 40.6,2.8 41.1,3.3 41.1,7.9 40.9,8.1 ; 35.7,8.5 40.5,8.5 40.9,8.1
  Top Layer w0.762: U2.1@16.048,23.582 ccw(c15.248,24.382) 16.38,24.382 ccw(c17.512,24.382) U2.1@16.712,23.582 ; U2.14@16.048,51.818 cw(c15.248,51.018) 16.38,51.018 cw(c17.512,51.018) U2.14@16.712,51.818 ; U2.1 U2.14 U2.13 U2.12 21.46,51.14 ; U2.14@16.712,51.968 cw(c17.512,51.168) 17.512,52.3 cw(c17.512,53.432) U2.14@16.712,52.632 ; U2.13@18.588,51.968 ccw(c17.788,51.168) 17.788,52.3 ccw(c17.788,53.432) U2.13@18.588,52.632 ; U2.13@19.252,51.968 cw(c20.052,51.168) 20.052,52.3 cw(c20.052,53.432) U2.13@19.252,52.632 ; U2.12@21.128,51.968 ccw(c20.328,51.168) 20.328,52.3 ccw(c20.328,53.432) U2.12@21.128,52.632 ; U2.12@21.157,51.792 cw(c20.607,51.14) 21.46,51.14 ; U2.12@21.177,52.227 ccw(c22.27,51.931) 21.469,51.131 ; U2.12@21.763,51.792 ccw(c22.313,51.14) 21.46,51.14 ; U2.12@21.913,52.027 ccw(c23.734,51.535) 22.4,50.2 ; U2.10@26.074,52.101 cw(c23.743,51.857) 25.4,50.2 ; U2.10 26.54,51.34 25.4,50.2 ; 21.46,51.14 22.4,50.2 ; 22.4,50.2 25.4,50.2
  Bottom Layer w0.305: U3.35 6.45,18.45 7.5,17.4 v1(8.5,17.4) 10,17.4 11.55,18.95 U3.47 11.55,22.25 11.9,22.6 11.9,25.7 ; U3.23 7.05,12.95 7.6,13.5 v1(8.5,13.5) ; v1(8.5,15.6) 9.2,14.9 11,14.9 11.55,15.45 U3.8 ; 9,24.7 9.2,24.9 ; J2.5@10.242,28.642 cw(c9.137,27.537) 10.7,27.537 cw(c12.263,27.537) 11.158,28.642 cw(c12.263,27.537) 12.263,29.1 cw(c12.263,30.663) J2.5@11.158,29.558 ; J2.5@10.458,28.858 cw(c9.872,28.272) 10.7,28.272 cw(c11.528,28.272) 10.942,28.858 cw(c11.528,28.272) 11.528,29.1 cw(c11.528,29.928) J2.5@10.942,29.342 ; 11.3,25.7 10.7,26.3 J2.5 J2.6 ; J2.6@12.093,28.875 ccw(c11.51,28.658) 11.671,29.259 ccw(c11.784,29.681) J2.6@12.153,29.447 ; J2.6@12.093,29.325 cw(c11.51,29.542) 11.671,28.941 cw(c11.784,28.519) J2.6@12.153,28.753 ; J2.6@12.242,28.642 ccw(c11.137,27.537) 11.137,29.1 ccw(c11.137,30.663) J2.6@12.242,29.558 ; J2.6@12.458,28.858 ccw(c11.872,28.272) 11.872,29.1 ccw(c11.872,29.928) J2.6@12.458,29.342 ; R16.1 R15.1 R14.1 31.352,39.4 32.271,38.481 32.271,15.66 31.928,15.316 v1(32.013,15.316) ; R16.1@18.24,39.26 cw(c18.577,38.923) 18.577,39.4 cw(c18.577,39.877) R16.1@18.24,39.54 ; R15.1@23.76,39.26 ccw(c23.423,38.923) 23.423,39.4 ccw(c23.423,39.877) R15.1@23.76,39.54 ; R15.1@24.24,39.26 cw(c24.577,38.923) 24.577,39.4 cw(c24.577,39.877) R15.1@24.24,39.54 ; R14.1@29.76,39.26 ccw(c29.423,38.923) 29.423,39.4 ccw(c29.423,39.877) R14.1@29.76,39.54 ; R14.1@30.24,39.26 cw(c30.577,38.923) 30.577,39.4 cw(c30.577,39.877) R14.1@30.24,39.54 ; v1@32.115,15.316 cw(c32.566,15.316) 32.247,15.635
  Bottom Layer w0.381: Q3.2@22.781,16.081 cw(c21.77,15.07) 23.2,15.07 ; Q3.2 23.2,16.3 R17.1 ; R17.1@23.087,14.813 ccw(c22.815,15.085) 23.2,15.085 ccw(c23.585,15.085) R17.1@23.313,14.813 ; Q2.2@34.881,24.981 cw(c33.629,23.729) R9.2@35.4,23.729 ; Q2.2@35.151,25.251 cw(c34.548,24.648) 35.4,24.648 ; R9.2@35.287,23.613 ccw(c35.015,23.885) 35.4,23.885 ccw(c35.785,23.885) R9.2@35.513,23.613 ; R9.2 35.4,25.1 Q2.2 35.1,25.8 35.8,26.5 37.685,26.5 38.9,25.285 R19.2@38.9,23.5 ; Q2.2@35.409,25.6 cw(c36.64,25.6) 35.77,26.47 ; 37.975,26.21 ccw(c38.7,26.934) Q4.2@38.7,25.909 ; Q4.2@38.253,25.932 cw(c37.921,25.6) Q4.2@38.39,25.6 ; Q4.2@38.481,24.981 cw(c37.47,23.97) 38.9,23.97 ; R19.2@38.787,23.613 ccw(c38.515,23.885) 38.9,23.885 ccw(c39.285,23.885) R19.2@39.013,23.613 ; R19.2 38.9,23.2 39.7,22.4 39.7,20.6 39.9,20.4 41.7,20.4 ; R19.2@39.059,23.3 ccw(c39.686,23.3) 39.243,22.857 ; 42.239,20.939 ccw(c41.284,21.894) J1.2@42.621,22.085 ; J1.2@42.244,22.031 cw(c40.341,21.759) 41.7,20.4 ; 42.777,21.477 ccw(c42.226,22.029) J1.2@42.998,22.139 ; J1.2 43.05,21.75 41.7,20.4
  Bottom Layer w0.508: J5.3@8.655,23.945 ccw(c8.065,24.535) 8.9,24.535 ccw(c9.735,24.535) J5.3@9.145,23.945 ; J5.3 8.9,24.8 9.8,25.7 11.3,25.7 11.9,25.7 13.6,25.7 15.1,24.2 15.1,21.5 v2(15.5,21.1) ; 15.1,22.372 ccw(c16.772,22.372) v2@15.59,21.19 ; v2(16.9,21.4) C7.2 C6.2 16.9,28.6 18.3,30 J3.2 ; J3.2@19.141,29.791 ccw(c18.635,29.285) 18.635,30 ccw(c18.635,30.715) J3.2@19.141,30.209 ; v2(19.6,20.4) 21.3,18.7 v2(21.3,16.5) Q3.2 ; Q3.2@22.826,16.326 ccw(c22.406,15.906) 22.406,16.5 ccw(c22.406,17.094) Q3.2@22.826,16.674 ; 42.674,9.1 ccw(c42.674,11.039) C1.2@44.173,9.809 ; J1.2@42.876,21.901 cw(c42.456,21.481) 43.05,21.481 cw(c43.644,21.481) J1.2@43.224,21.901 ; J1.2@43.05,21.75 43.05,19.05 44.5,17.6 46.4,17.6 46.9,17.1 46.9,11.6 ; 43.111,9.1 cw(c43.111,8.061) C1.2@43.846,8.796 ; C1.2@43.528,9.1 ccw(c43.528,10.772) C1.2@44.71,9.59 ; C1.2@43.78,10.132 cw(c41.6,11.919) R7.2 44.4,9.1 v2(44.8,9.5) C1.2@45.4,10.1 ; C1.2@44.353,10.212 ccw(c41.92,12.7) v2(45.4,12.7) C1.2@45.4,10.1 ; C1.2@44.709,9.849 ccw(c43.101,11.492) 45.4,11.492 ; C1.2@44.923,9.532 cw(c46.068,9.825) C1.2@45.051,10.427 ; C1.2@45.05,10.496 ccw(c45.05,12.297) 46.324,11.024 ; 45.4,11.06 ccw(c46.61,11.06) C1.2@45.754,10.204 ; C1.2@45.538,9.505 cw(c47.267,9.522) C1.2@46.044,10.744 ; C1.2@46.046,9.51 cw(c48.962,9.538) 46.9,11.6 ; C1.2@45.4,10.1 46.9,11.6
  other v2: 13.3,43.6 13.3,46.5 21.5,46.6 27.7,46.7
LEDKEY: D5.2 U3.13 | length 100.8
  Top Layer w0.305: v1(8.2,67.3) 13.7,67.3 15,66 D5.2 ; 22.402,66 ccw(c22.402,66.598) D5.2@22.825,66.175 ; 22.402,66 cw(c22.402,65.402) D5.2@22.825,65.825
  Bottom Layer w0.305: v1(8.2,67.3) 7.6,67.3 0.8,60.5 0.8,36.853 6.543,31.111 6.543,28.689 0.543,22.689 0.543,11.211 6.368,5.386 11.132,5.386 12.357,6.611 12.357,10.829 12.05,11.136 U3.13
LEDPOW: D6.2 U3.14 | length 82.3
  Top Layer w0.305: v1@6.174,64.798 ccw(c6.045,65.277) 6.475,65.029 ; v1@6.196,64.802 ccw(c6.186,65.073) 6.422,64.937 ; v1(6.2,64.7) 7,65.5 D6.2 ; 6.401,64.901 ccw(c5.551,65.75) D6.2@6.752,65.75
  Bottom Layer w0.305: v1(6.2,64.7) 1.257,59.757 1.257,37.043 7,31.3 7,28.5 1,22.5 1,11.4 6.557,5.843 10.943,5.843 11.9,6.8 11.9,10.64 11.55,10.99 U3.14
LEDTEST: D7.2 U3.29 | length 17.9
  Top Layer w0.305: v1(6.2,9.2) 13.2,9.2 v1(13.4,9.4) ; 12.672,9.2 ccw(c12.672,10.128) v1@13.328,9.472
  Bottom Layer w0.305: U3.29 3.25,15.45 2.829,15.029 2.829,12.158 5.786,9.2 v1(6.2,9.2)
NetC5_1: C5.1 R2.2 R6.1 U1.4 | length 5.2
  Top Layer w0.508: R2.2@36.6,15.8 38.1,15.8 C5.1 39.75,15.95 U1.4 ; C5.1@39.783,15.767 cw(c40.223,15.327) 40.223,15.95
NetD1_1: D1.1 R10.1 S1.2 | length 94.5
  Top Layer w0.305: S1.2@17.75,12.5 S1.2@30.25,12.5 ; S1.2@18.272,11.978 cw(c19.532,10.718) 19.532,12.5 cw(c19.532,14.282) S1.2@18.272,13.022 ; S1.2@18.487,11.763 cw(c20.268,9.982) 20.268,12.5 cw(c20.268,15.018) S1.2@18.487,13.237 ; S1.2@18.703,11.547 cw(c21.003,9.247) 21.003,12.5 cw(c21.003,15.753) S1.2@18.703,13.453 ; S1.2@29.297,11.547 ccw(c26.997,9.247) 26.997,12.5 ccw(c26.997,15.753) S1.2@29.297,13.453 ; S1.2@29.513,11.763 ccw(c27.732,9.982) 27.732,12.5 ccw(c27.732,15.018) S1.2@29.513,13.237 ; S1.2@29.728,11.978 ccw(c28.468,10.718) 28.468,12.5 ccw(c28.468,14.282) S1.2@29.728,13.022
  Bottom Layer w0.305: R10.1 D1.1 30,44.9 32.728,42.172 32.728,14.978 S1.2@30.25,12.5 ; R10.1@30.1,44.502 cw(c30.1,43.784) 30.608,44.292 ; S1.2@30.25,13.238 ccw(c30.25,15.02) 31.51,13.76 ccw(c32.77,12.5) S1.2@30.988,12.5 ; S1.2@30.25,13.543 ccw(c30.25,16.06) 32.03,14.28 ccw(c33.81,12.5) S1.2@31.293,12.5 ; S1.2@30.25,13.848 ccw(c30.25,17.101) 32.55,14.8 ccw(c34.851,12.5) S1.2@31.598,12.5 ; 30,45.177 cw(c29.523,45.177) 29.86,44.84 ccw(c29.523,45.177) 30,45.177 ; 30,45.177 ccw(c30.477,45.177) 30.14,44.84 cw(c30.477,45.177) 30,45.177 ; 30,46.278 cw(c31.322,46.278) 30.387,47.213 ccw(c31.322,46.278) 30,46.278 ; 30,46.278 ccw(c28.678,46.278) 29.613,47.213 cw(c28.678,46.278) 30,46.278
NetD1_2: D1.2 D2.2 D3.2 R8.1 | length 59.5
  Top Layer w0.305: v1(34.2,50.2) 35.1,49.3 v1(35.1,45.8)
  Bottom Layer w0.305: D3.2 33.3,51.1 v1(34.2,50.2) ; D3.2@18.587,50.713 cw(c19.522,49.778) 19.522,51.1 cw(c19.522,52.422) D3.2@18.587,51.487 ; D2.2@23.413,50.713 ccw(c22.478,49.778) 22.478,51.1 ccw(c22.478,52.422) D2.2@23.413,51.487 ; D2.2@24.587,50.713 cw(c25.522,49.778) 25.522,51.1 cw(c25.522,52.422) D2.2@24.587,51.487 ; 28.237,51.1 cw(c28.237,49.437) D1.2@29.413,50.613 ; 28.719,51.1 ccw(c28.719,52.081) D1.2@29.413,51.387 ; 28.972,51.1 cw(c28.972,50.172) D1.2@29.628,50.828 ; D1.2@30.372,50.828 cw(c31.028,50.172) 31.028,51.1 ; D1.2@30.587,50.613 cw(c31.763,49.437) 31.763,51.1 ; D1.2@30.587,51.387 ccw(c31.281,52.081) 31.281,51.1 ; v1(35.1,45.8) 34.1,44.8 34.1,22.2 34.8,21.5 R8.1 ; R8.1@35.26,21.36 ccw(c34.923,21.023) 34.923,21.5 ccw(c34.923,21.977) R8.1@35.26,21.64
NetD2_1: D2.1 R11.1 S2.2 | length 109.8
  Top Layer w0.305: S2.2@4.547,38.703 ccw(c2.247,41.003) 5.5,41.003 ccw(c8.753,41.003) S2.2@6.453,38.703 ; S2.2@4.547,49.297 cw(c2.247,46.997) 5.5,46.997 cw(c8.753,46.997) S2.2@6.453,49.297 ; S2.2@4.763,38.487 ccw(c2.982,40.268) 5.5,40.268 ccw(c8.018,40.268) S2.2@6.237,38.487 ; S2.2@4.763,49.513 cw(c2.982,47.732) 5.5,47.732 cw(c8.018,47.732) S2.2@6.237,49.513 ; S2.2@4.978,38.272 ccw(c3.718,39.532) 5.5,39.532 ccw(c7.282,39.532) S2.2@6.022,38.272 ; S2.2@4.978,49.728 cw(c3.718,48.468) 5.5,48.468 cw(c7.282,48.468) S2.2@6.022,49.728 ; S2.2@5.5,37.75 S2.2@5.5,50.25
  Bottom Layer w0.305: S2.2@5.5,50.25 7.65,52.4 ; S2.2@5.536,50.987 ccw(c5.61,52.495) 6.677,51.427 ccw(c7.745,50.36) S2.2@6.237,50.286 ; S2.2@5.551,51.292 ccw(c5.656,53.422) 7.164,51.914 ccw(c8.672,50.406) S2.2@6.542,50.301 ; S2.2@5.566,51.596 ccw(c5.701,54.349) 7.65,52.4 ; S2.2@6.846,50.316 cw(c9.599,50.451) 7.65,52.4 ; D2.1@23.613,47.313 cw(c22.678,46.378) 24,46.378 cw(c25.322,46.378) D2.1@24.387,47.313 ; R11.1@23.86,44.84 ccw(c23.523,45.177) 24,45.177 ccw(c24.477,45.177) R11.1@24.14,44.84 ; R11.1 D2.1 25.2,48.9 32.9,48.9 33.7,48.1 38.3,48.1 39.6,49.4 39.6,51.4 38.6,52.4 7.65,52.4 ; D2.1@24.2,48.248 ccw(c24.2,49.087) 24.793,48.493 ; D2.1@24.443,47.712 cw(c25.37,47.757) 24.713,48.413 ; D2.1@24.747,47.727 cw(c26.298,47.802) 25.2,48.9
NetD3_1: D3.1 R12.1 S3.2 | length 65.5
  Top Layer w0.305: S3.2@36.547,38.703 ccw(c34.247,41.003) 37.5,41.003 ccw(c40.753,41.003) S3.2@38.453,38.703 ; S3.2@36.547,49.297 cw(c34.247,46.997) 37.5,46.997 cw(c40.753,46.997) S3.2@38.453,49.297 ; S3.2@36.763,38.487 ccw(c34.982,40.268) 37.5,40.268 ccw(c40.018,40.268) S3.2@38.237,38.487 ; S3.2@36.763,49.513 cw(c34.982,47.732) 37.5,47.732 cw(c40.018,47.732) S3.2@38.237,49.513 ; S3.2@36.978,38.272 ccw(c35.718,39.532) 37.5,39.532 ccw(c39.282,39.532) S3.2@38.022,38.272 ; S3.2@36.978,49.728 cw(c35.718,48.468) 37.5,48.468 cw(c39.282,48.468) S3.2@38.022,49.728 ; S3.2@37.5,37.75 S3.2@37.5,50.25
  Bottom Layer w0.305: D3.1@17.613,47.313 cw(c16.678,46.378) 18,46.378 cw(c19.322,46.378) D3.1@18.387,47.313 ; R12.1@17.86,44.84 ccw(c17.523,45.177) 18,45.177 ccw(c18.477,45.177) R12.1@18.14,44.84 ; R12.1 D3.1 19.7,49.4 36.65,49.4 S3.2@37.5,50.25 ; D3.1@18.2,48.248 ccw(c18.2,49.087) 18.793,48.493 ; D3.1@18.443,47.7 cw(c19.512,47.7) 18.756,48.456 ; D3.1@18.748,47.7 cw(c20.552,47.7) 19.276,48.976
NetD4_2: D4.2 R20.2 | length 3.9
  Top Layer w0.305: R20.2 D4.2 ; R20.2@36.94,65.86 cw(c37.277,65.523) 37.277,66 cw(c37.277,66.477) R20.2@36.94,66.14 ; D4.2@38.825,65.825 ccw(c38.402,65.402) 38.402,66 ccw(c38.402,66.598) D4.2@38.825,66.175
NetD5_1: D5.1 R22.2 | length 3.8
  Top Layer w0.305: D5.1 R22.2 ; D5.1@25.175,65.825 cw(c25.598,65.402) 25.598,66 cw(c25.598,66.598) D5.1@25.175,66.175 ; R22.2@26.96,65.86 ccw(c26.623,65.523) 26.623,66 ccw(c26.623,66.477) R22.2@26.96,66.14
NetD6_1: D6.1 R23.2 | length 3.9
  Top Layer w0.305: D6.1 R23.2 ; D6.1@9.175,65.825 cw(c9.598,65.402) 9.598,66 cw(c9.598,66.598) D6.1@9.175,66.175 ; R23.2@11.06,65.86 ccw(c10.723,65.523) 10.723,66 ccw(c10.723,66.477) R23.2@11.06,66.14
NetD7_1: D7.1 R24.2 | length 3.7
  Bottom Layer w0.305: D7.1 R24.2@15.3,7.4 ; D7.1@13.825,7.225 cw(c14.248,6.802) 14.248,7.4 cw(c14.248,7.998) D7.1@13.825,7.575 ; 14.44,7.4 ccw(c14.44,8.56) R24.2@15.26,7.74
NetQ1_1: Q1.1 R1.2 R4.2 | length 9.3
  Top Layer w0.508: R1.2@38.3,34.404 cw(c38.3,33.931) R1.2@38.635,34.265 ; R1.2 39.65,33.25 Q1.1 39.65,31.45 v2(39.3,31.1) ; R1.2@38.537,34.363 ccw(c39.65,35.476) Q1.1@39.65,33.902 ; v2@39.21,31.19 ccw(c38.148,32.252) Q1.1@39.65,32.252 ; Q1.1@39.405,32.231 cw(c38.815,31.641) 39.65,31.641 cw(c40.485,31.641) Q1.1@39.895,32.231
  Bottom Layer w0.508: R4.2 v2(39.3,31.1)
NetQ2_1: Q2.1 R8.2 R9.1 | length 7.5
  Bottom Layer w0.305: Q2.1@36.854,24.954 cw(c36.502,24.602) 37,24.602 ; R8.2@36.86,21.74 ccw(c36.523,22.077) 37,22.077 ccw(c37.477,22.077) R8.2@37.14,21.74 ; R9.1@36.86,23.16 cw(c36.523,22.823) 37,22.823 cw(c37.477,22.823) R9.1@37.14,23.16 ; R9.1@36.86,23.64 ccw(c36.523,23.977) 37,23.977 ccw(c37.477,23.977) R9.1@37.14,23.64 ; R8.2 R9.1 37,25.3 Q2.1 ; 37,24.119 cw(c38.181,24.119) Q2.1@37.346,24.954
NetQ2_3: Q2.3 Q4.3 R4.1 | length 10.8
  Bottom Layer w0.508: Q2.3@35.926,27.974 ccw(c35.506,28.394) 36.1,28.394 ccw(c36.694,28.394) Q2.3@36.274,27.974 ; 36.159,30.659 cw(c36.75,30.069) R4.1@36.75,30.904 ; Q2.3@36.274,27.426 cw(c36.694,27.006) 36.694,27.6 cw(c36.694,28.194) Q2.3@36.274,27.774 ; R4.1@36.6,31.1 36.1,30.6 Q2.3 Q4.3 ; Q4.3@39.526,27.426 ccw(c39.106,27.006) 39.106,27.6 ccw(c39.106,28.194) Q4.3@39.526,27.774
NetQ3_1: Q3.1 R13.2 R17.2 | length 6.9
  Bottom Layer w0.381: R13.2@24.687,12.813 ccw(c24.415,13.085) 24.8,13.085 ccw(c25.185,13.085) R13.2@24.913,12.813 ; R17.2@24.687,14.387 cw(c24.415,14.115) 24.8,14.115 cw(c25.185,14.115) R17.2@24.913,14.387 ; R17.2@24.687,14.813 ccw(c24.415,15.085) 24.8,15.085 ccw(c25.185,15.085) R17.2@24.913,14.813 ; R13.2 R17.2 24.8,16.3 Q3.1 ; 24.8,15.07 cw(c26.23,15.07) Q3.1@25.219,16.081
NetQ4_1: Q4.1 R18.2 R19.1 | length 6.8
  Bottom Layer w0.381: R18.2@40.387,21.713 ccw(c40.115,21.985) 40.5,21.985 ccw(c40.885,21.985) R18.2@40.613,21.713 ; R19.1@40.387,23.187 cw(c40.115,22.915) 40.5,22.915 cw(c40.885,22.915) R19.1@40.613,23.187 ; R19.1@40.387,23.613 ccw(c40.115,23.885) 40.5,23.885 ccw(c40.885,23.885) R19.1@40.613,23.613 ; R18.2@40.5,21.6 40.5,23.5 Q4.1@40.5,25.2 ; 40.5,23.97 cw(c41.93,23.97) Q4.1@40.919,24.981
  Bottom Layer w0.508: Q4.1@40.5,25.2 Q4.1
NetR20_1: R20.1 U4.1 | length 76.1
  Top Layer w0.305: v1@33.628,10.828 cw(c32.972,10.172) 33.9,10.172 ; v1(33.7,10.9) 33.9,10.7 33.9,10.025 ; U4.1@34.103,9.463 ccw(c33.403,9.528) 33.9,10.025 ; U4.1 33.9,10.025 ; R20.1 35.2,65.7 36.3,64.6 41.3,64.6 v1(41.4,64.5) ; R20.1@35.398,65.9 ccw(c36.357,65.9) 35.679,65.221 ; 40.913,64.6 cw(c40.913,64.013) v1@41.328,64.428
  Bottom Layer w0.305: v1(33.7,10.9) 32.843,11.757 32.843,13.443 33.186,13.786 33.186,45.532 35.253,47.6 42.843,47.6 44.843,49.6 44.843,61.057 v1(41.4,64.5)
NetR21_2: R21.2 U4.5 | length 3
  Top Layer w0.305: R21.2@36.4,10.802 cw(c36.4,10.084) 36.908,10.592 ; R21.2 36.925,10.575 U4.5 ; U4.5@36.821,9.554 ccw(c36.569,9.806) 36.925,9.806 ccw(c37.281,9.806) U4.5@37.029,9.554
NRST: C14.1 U3.7 | length 6.2
  Top Layer w0.305: C14.1@9.949,14.932 ccw(c10.049,15.331) C14.1@10.34,15.04 ; C14.1@10.023,15.227 ccw(c10.202,15.938) 10.72,15.42 ; C14.1@10.097,15.523 ccw(c10.355,16.545) v1(11.1,15.8) 10.2,14.9 C14.1@10.1,14.9
  Bottom Layer w0.305: v1(11.1,15.8) 11.25,15.95 U3.7
POWEN: R18.1 U3.32 | length 50.4
  Top Layer w0.305: v1(6.68,16.459) 6.68,11.582 7.722,10.541 21.259,10.541 v1(21.8,10)
  Bottom Layer w0.305: U3.32 6.189,16.95 v1(6.68,16.459) ; v1(21.8,10) 22,9.8 33.585,9.8 35.585,11.8 35.585,19.66 36.373,20.447 37.847,20.447 R18.1 ; v1@21.872,10.072 ccw(c22.528,10.728) 22.528,9.8 ; 38.392,20.992 cw(c38.9,20.484) R18.1@38.9,21.202
SPARE1: R25.2 U3.21 | length 3.7
  Bottom Layer w0.305: U3.21 8.05,10.25 R25.2 ; 8.592,9.708 cw(c8.084,9.2) R25.2@8.802,9.2
SPARE2: R26.2 U3.22 | length 3.5
  Bottom Layer w0.305: R26.2@7.46,9.34 ccw(c7.244,9.556) 7.55,9.556 ; 7.55,9.798 ccw(c8.198,9.798) R26.2@7.74,9.34 ; U3.22 7.55,9.25 R26.2
SWCLK: J5.2 U3.37 | length 8.1
  Bottom Layer w0.305: U3.37 6.55,21.65 7.3,22.4 9.6,22.4 J5.2 ; J5.2@10.452,23.7 cw(c9.372,23.7) 10.136,22.936 cw(c10.9,22.172) J5.2@10.9,23.252
SWDIO: J5.4 U3.34 | length 10.6
  Bottom Layer w0.305: 4.066,18.134 ccw(c4.54,18.608) U3.34@4.54,17.938 ; U3.34@4.548,17.941 cw(c4.404,18.104) 4.25,17.95 ; U3.34 4.25,17.95 ; J5.4@6.452,23.7 cw(c5.372,23.7) 6.136,22.936 cw(c6.9,22.172) J5.4@6.9,23.252 ; J5.4 3.743,20.543 3.743,18.457 4.25,17.95
TTL1_RX: J2.3 U3.31 | length 23
  Bottom Layer w0.305: U3.31 3.65,16.45 3.286,16.814 3.286,21.553 9.343,27.61 9.343,29.743 J2.3 ; J2.3@10.052,31.1 cw(c8.489,31.1) 9.594,29.994 cw(c10.7,28.889) J2.3@10.7,30.452 ; J2.3@10.357,31.1 cw(c9.53,31.1) 10.115,30.515 cw(c10.7,29.93) J2.3@10.7,30.757
TTL1_TX: J2.1 U3.30 | length 26.2
  Bottom Layer w0.305: U3.30 3.193,15.95 2.829,16.314 2.829,21.742 8.886,27.8 8.886,31.286 J2.1 ; J2.1@10.052,33.1 cw(c8.489,33.1) 9.594,31.994 cw(c10.7,30.889) J2.1@10.7,32.452 ; J2.1@10.357,33.1 cw(c9.53,33.1) 10.115,32.515 cw(c10.7,31.93) J2.1@10.7,32.757
VBUS: C8.1 C9.1 D4.1 J4.1 U4.4 | length 111.6
  Top Layer w0.305: 33.62,13.11 ccw(c33.43,13.3) v1@33.698,13.3 ; v1(33.8,13.3) 33.8,13.29 31.9,11.39 31.9,7.5 32.9,6.5 35.875,6.5 U4.4 ; 36.289,6.914 ccw(c35.653,7.55) U4.4@36.552,7.55 ; D4.1@41,65.502 cw(c41,64.784) 41.508,65.292 ; D4.1 41,65.8 v1(42.2,64.6) ; D4.1@41.248,65.75 ccw(c41.725,65.75) D4.1@41.387,65.413
  Top Layer w0.508: J4.1 22.7,7.6 23.241,8.141 25.659,8.141 28,5.8 33.2,5.8 35.4,3.6 ; C8.1@36.106,3.16 ccw(c35.4,2.813) 35.4,3.6 ; C8.1@36.106,4.04 cw(c35.4,4.387) 35.4,3.6 ; U4.4 38.25,7.55 39.9,5.9 C9.1 ; C8.1@37.405,3.578 cw(c38.947,2.543) 38.947,4.4 ; C8.1@37.827,3.295 cw(c39.9,1.903) C9.1 ; 35.4,3.6 C8.1 37.8,4.4 C9.1
  Bottom Layer w0.305: 33.643,13.925 ccw(c34.425,13.925) v1@33.872,13.372 ; v1(33.8,13.3) 33.643,13.457 33.643,45.343 35.443,47.143 43.032,47.143 45.3,49.411 45.3,61.5 v1(42.2,64.6)
WAKEUP: R27.2 U3.10 | length 14.6
  Bottom Layer w0.305: U3.10 19.65,14.45 20.5,13.6 23.6,13.6 24,13.2 24,11.3 R27.2@23.3,10.6 ; R27.2@23.2,10.898 ccw(c23.2,11.857) 23.879,11.179
XTAL: U3.5
YL_EN: R13.1 U3.11 | length 13.8
  Bottom Layer w0.305: U3.11 13.559,13.941 15.159,13.941 15.7,13.4 15.7,11.4 16.7,10.4 21,10.4 R13.1 ; 22.692,12.092 cw(c23.2,11.584) R13.1@23.2,12.302
YL_ENOUT: J3.1 Q3.3 R5.1 U2.3 | length 30.3
  Top Layer w0.305: U2.3@20.967,22.457 cw(c19.776,21.266) 21.46,21.266 cw(c23.144,21.266) U2.3@21.953,22.457 ; U2.3@21.182,22.672 cw(c20.512,22.002) 21.46,22.002 cw(c22.408,22.002) U2.3@21.738,22.672 ; 21.39,21.528 ccw(c21.931,21.673) v1@21.651,21.188 ; 21.46,21.683 ccw(c22.183,21.683) v1@21.672,21.172 ; U2.3 21.46,21.24 v1(21.6,21.1) ; 21.603,21.798 ccw(c22.427,21.578) v1@21.688,21.151
  Bottom Layer w0.305: R5.1@21.46,22.16 cw(c21.123,21.823) 21.6,21.823 cw(c22.077,21.823) R5.1@21.74,22.16 ; R5.1@21.7,22.498 ccw(c21.7,23.457) 22.379,22.779 ; 23.065,19.635 ccw(c24,20.57) Q3.3@24,19.248 ; Q3.3@23.548,19.152 cw(c23.296,18.9) Q3.3@23.652,18.9 ; Q3.3 v1(21.6,21.1) R5.1 21.9,22.3 22.4,22.8 22.4,24.9 23.1,25.6 27.9,25.6 28.45,26.15 J3.1 ; J3.1@28.169,29.719 cw(c27.49,29.04) 28.45,29.04 cw(c29.41,29.04) J3.1@28.731,29.719
YL_RX: J2.2 U2.4 | length 28.2
  Top Layer w0.305: U2.4@23.507,23.743 ccw(c22.316,24.934) 24,24.934 ccw(c25.684,24.934) U2.4@24.493,23.743 ; U2.4@23.722,23.528 ccw(c23.052,24.198) 24,24.198 ccw(c24.948,24.198) U2.4@24.278,23.528 ; U2.4 v1(24,27.3)
  Bottom Layer w0.305: J2.2 22.3,33.1 24,31.4 v1(24,27.3) ; J2.2@12.942,32.858 cw(c13.528,32.272) 13.528,33.1 cw(c13.528,33.928) J2.2@12.942,33.342 ; J2.2@13.158,32.642 cw(c14.263,31.537) 14.263,33.1 cw(c14.263,34.663) J2.2@13.158,33.558
YL_TX: J2.4 U2.5 | length 28.6
  Top Layer w0.305: U2.5@26.047,23.743 ccw(c24.856,24.934) 26.54,24.934 ccw(c28.224,24.934) U2.5@27.033,23.743 ; U2.5@26.262,23.528 ccw(c25.592,24.198) 26.54,24.198 ccw(c27.488,24.198) U2.5@26.818,23.528 ; U2.5 26.54,26.16 v1(26.56,26.16) ; 26.54,25.866 cw(c26.854,25.866) v1@26.632,26.088
  Bottom Layer w0.305: J2.4 21.9,31.1 23.2,29.8 23.2,27.3 23.9,26.6 26.12,26.6 v1(26.56,26.16) ; J2.4@12.942,30.858 cw(c13.528,30.272) 13.528,31.1 cw(c13.528,31.928) J2.4@12.942,31.342 ; J2.4@13.158,30.642 cw(c14.263,29.537) 14.263,31.1 cw(c14.263,32.663) J2.4@13.158,31.558
pads on no net: J1.3 J1.4 J4.2 J4.3 J4.4 R25.1 R26.1 R27.1 U2.6 U2.7 U2.8 U2.9 U3.2 U3.3 U3.4 U3.6 U3.18 U3.19 U3.20 U3.25 U3.26 U3.27 U3.28 U3.33 U3.38 U3.39 U3.40 U3.41 U3.42 U3.43 U3.45 U3.46

## Polygon pours and split planes (outlines as drawn)
GND on Top Layer "Bottom Layer-No Net" (solid, remove dead copper, pour order 2): 0,0 0,53 48,53 48,0
GND on Bottom Layer "Bottom Layer-No Net" (solid, remove dead copper, pour order 4): 0,53 48,53 48,0 0,0

## Keep-outs
Keep-Out Layer:
  lines w0.152: 0,5 ccw(c5,5) 5,0 20.25,0 27.75,0 43,0 ccw(c43,5) 48,5 48,67 ccw(c43,67) 43,72 5,72 ccw(c5,67) 0,67 0,5

## Silkscreen, mask and mechanical layers (free items; w line width, h text height)
Bottom Overlay:
  text "YL_RX" at 17.882,32.766 h0.76
  text "TX" at 9.068,32.614 h0.76
  text "YL_TX" at 17.857,30.6 h0.76
  text "RX" at 9.1,30.5 h0.76
  text "GND" at 9.068,28.575 h0.76
  text "GND" at 17.856,28.575 h0.76
  text "+" at 13.7,25 h0.76
  text "+-" at 41.783,23.241 h0.76 r90

## Dimensions
5,0 to 5,72 on Keep-Out Layer
0,5 to 48,5 on Keep-Out Layer